# Altium PCB Layout_Dendro.PcbDoc (part 1 of 2)
Units mm, origin at the board's own origin, x right, y up, seen from the top; angles counter-clockwise.
Board outline 80 x 80 mm, 4 copper layers (L1 - TOP (Sig), L2 (GND), L3 (GND), L4 - BOT (Sig)), stack 0.603 mm thick; 132 components, 78 nets, 366 pads, 100 vias.
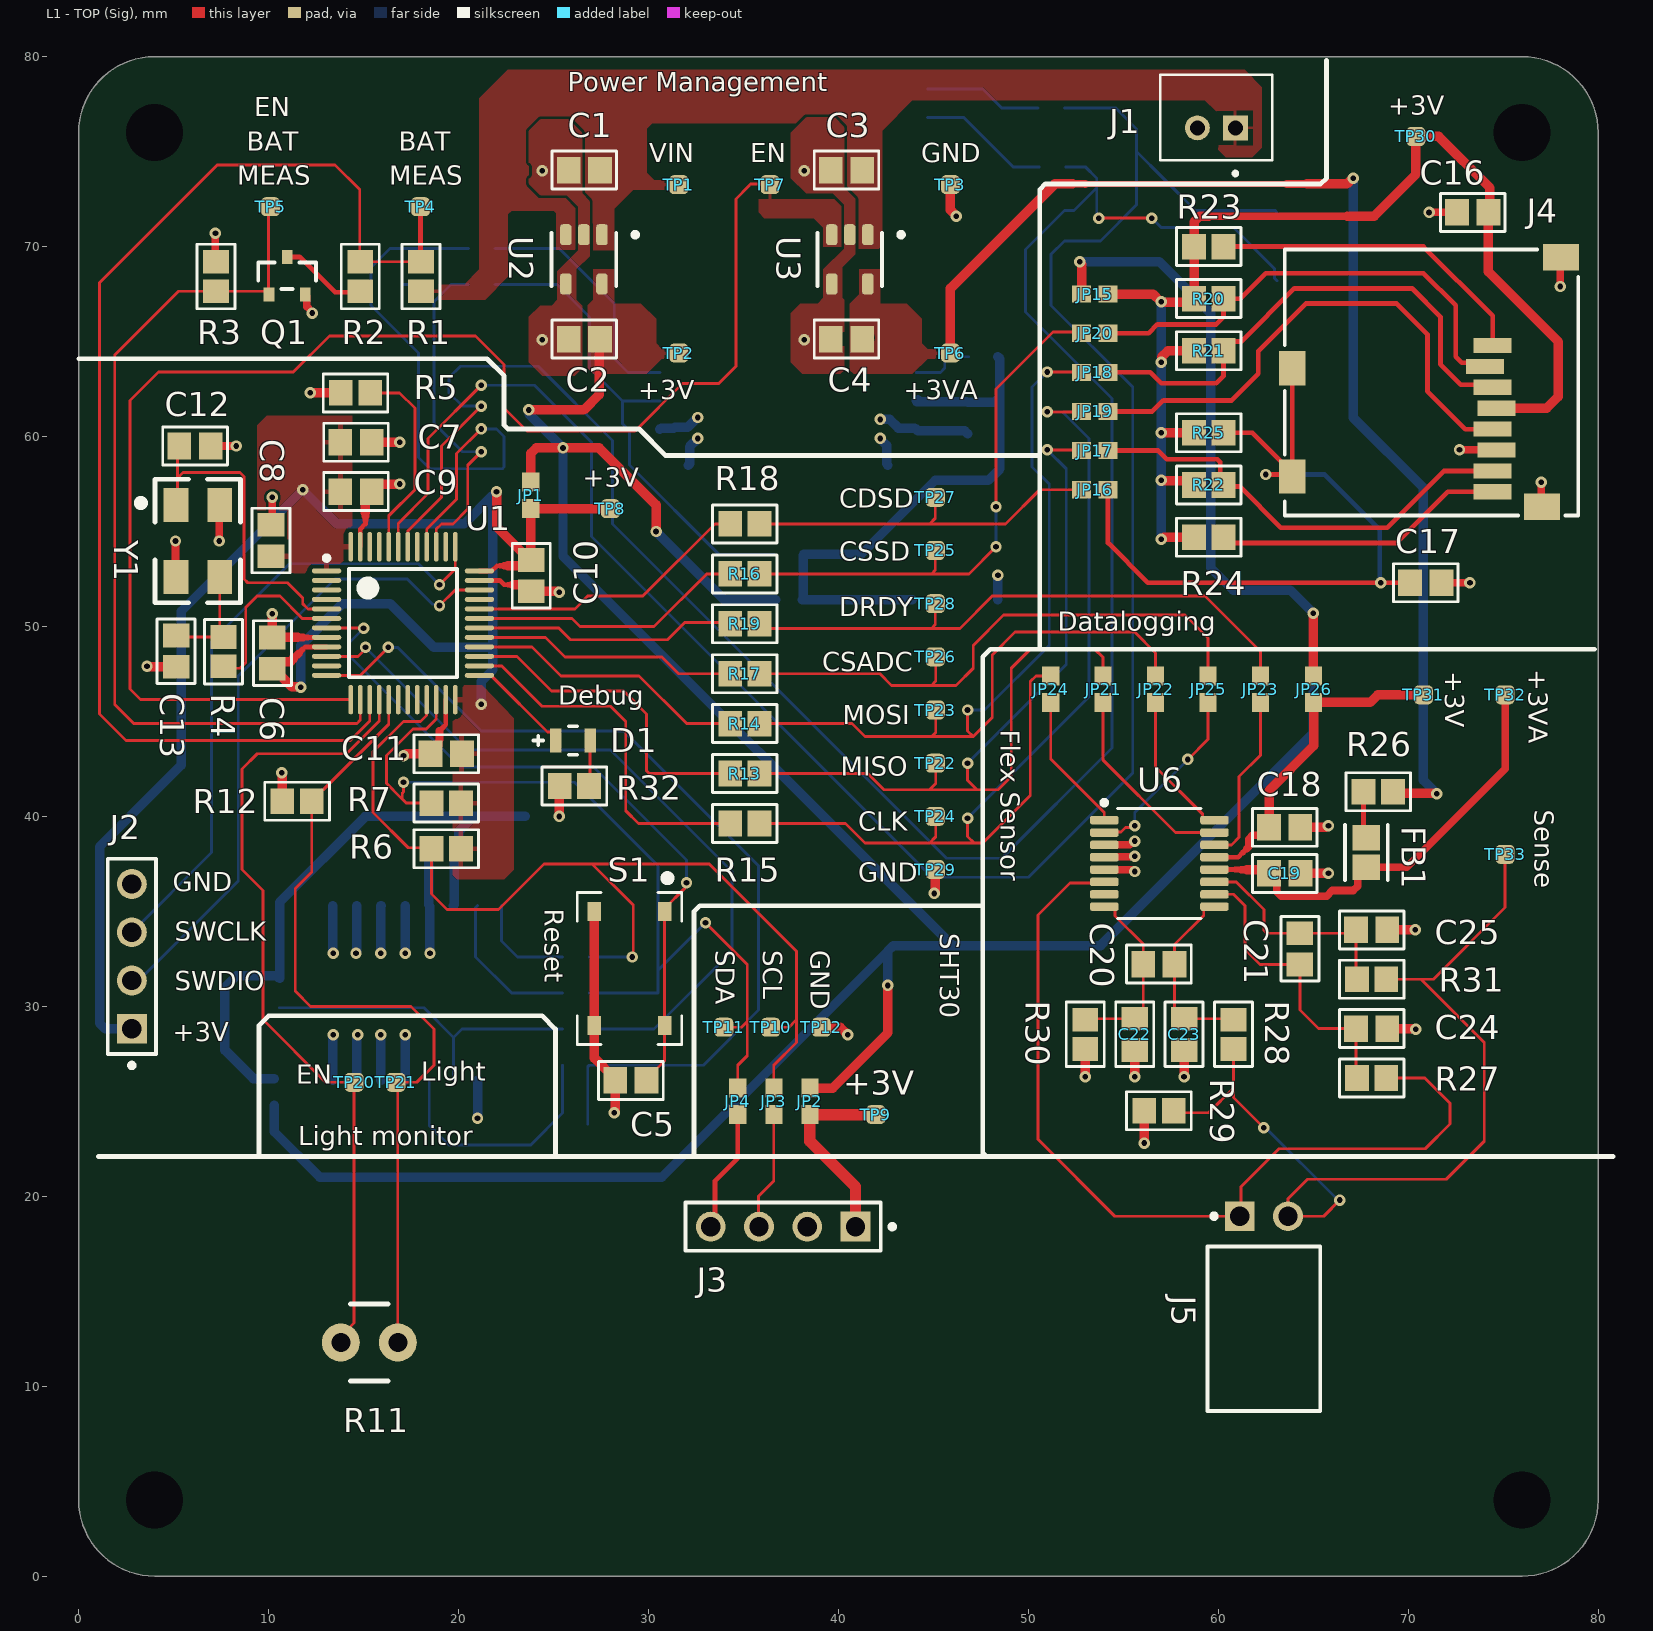
[diagram p0: L1 - TOP (Sig) view]
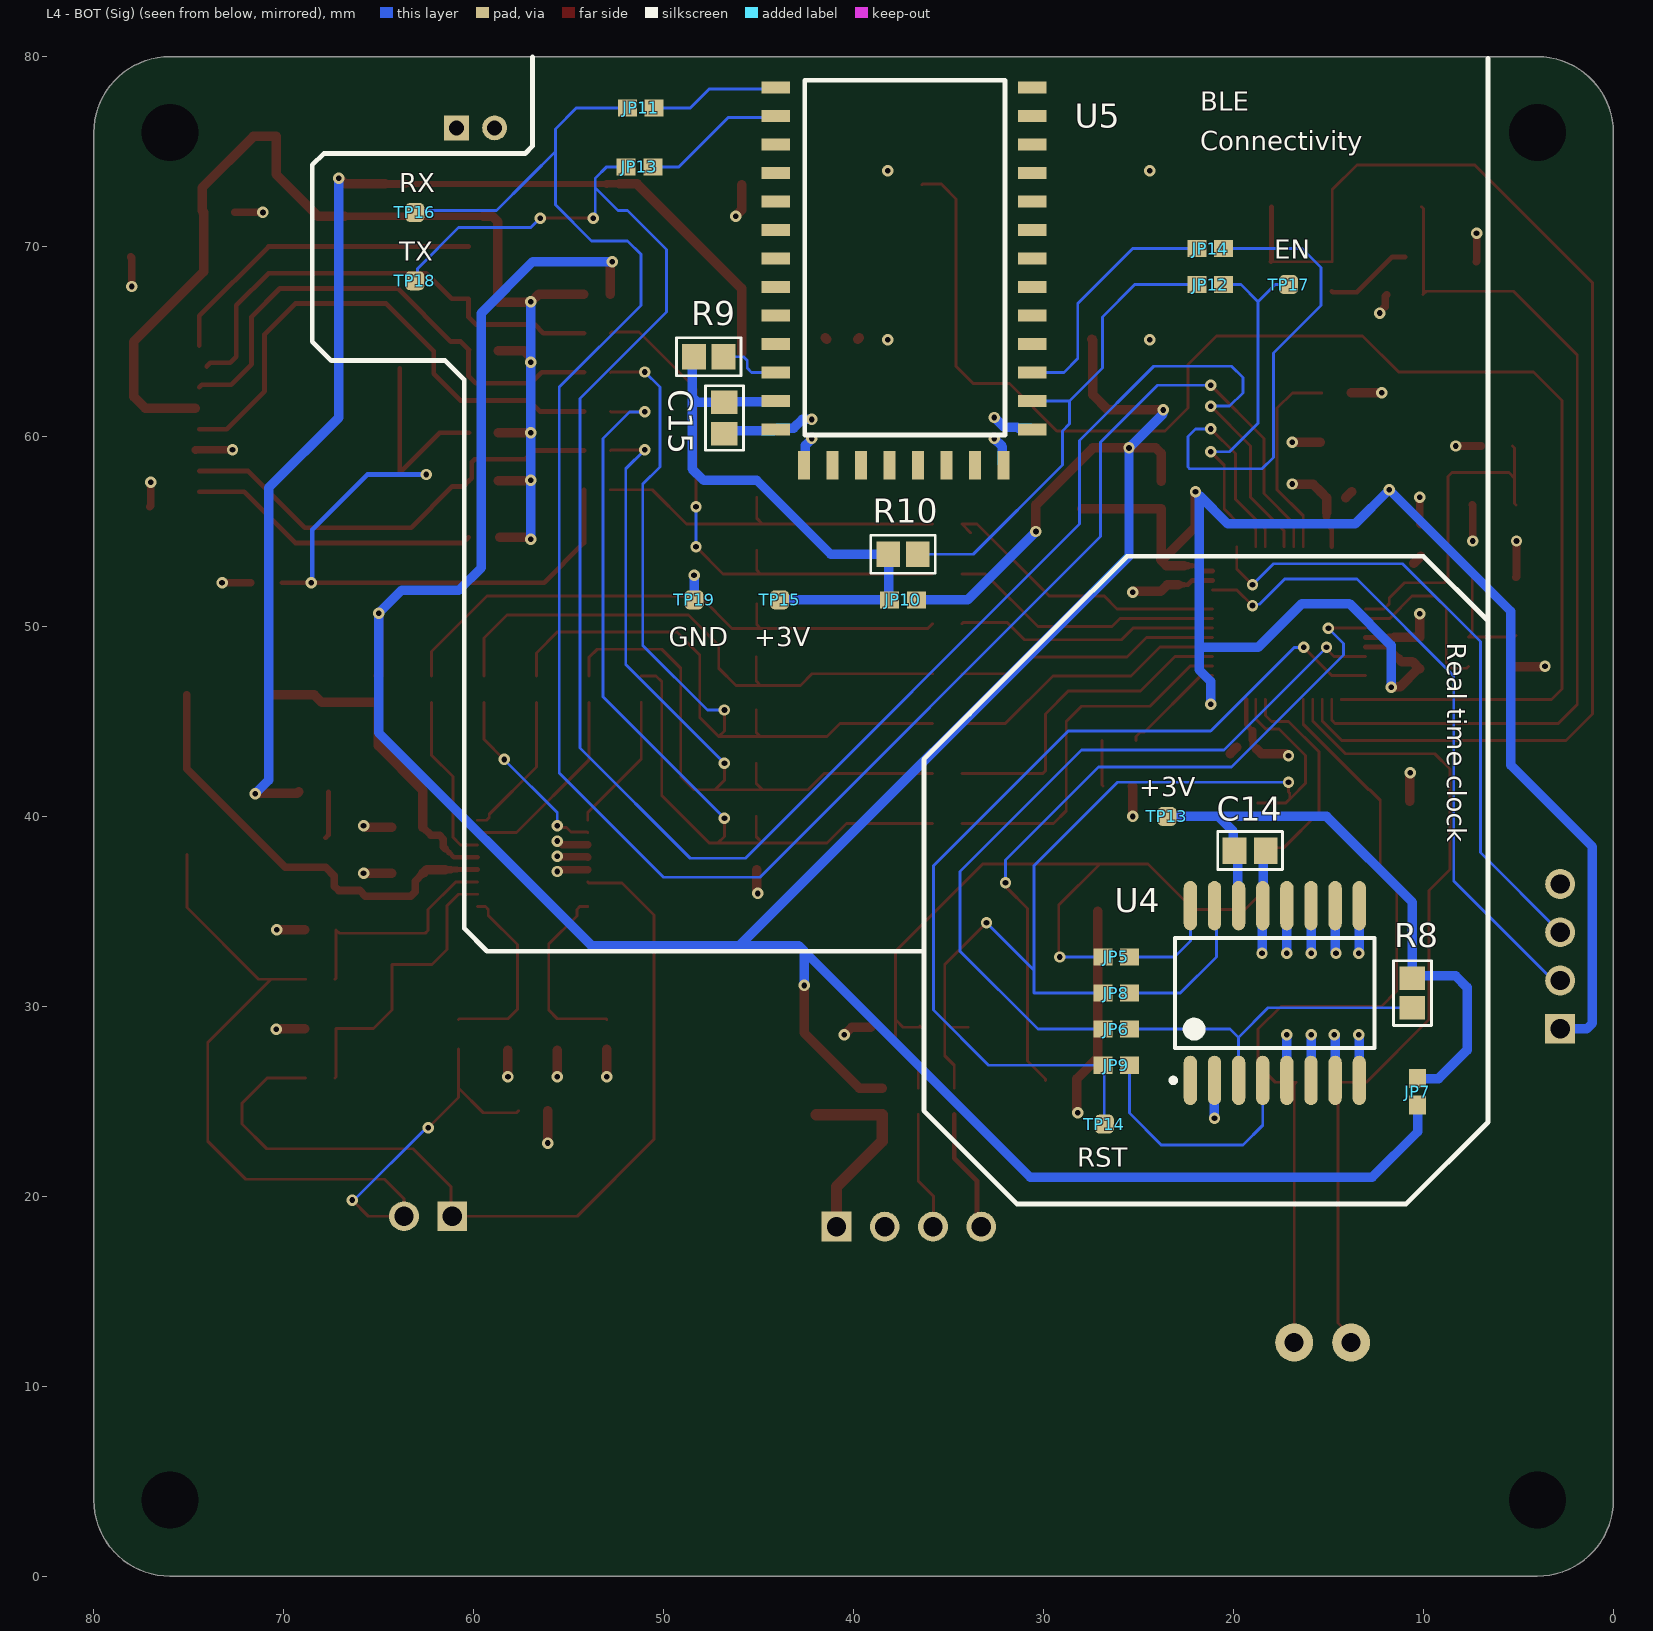
[diagram p1: L4 - BOT (Sig) view, seen from below]
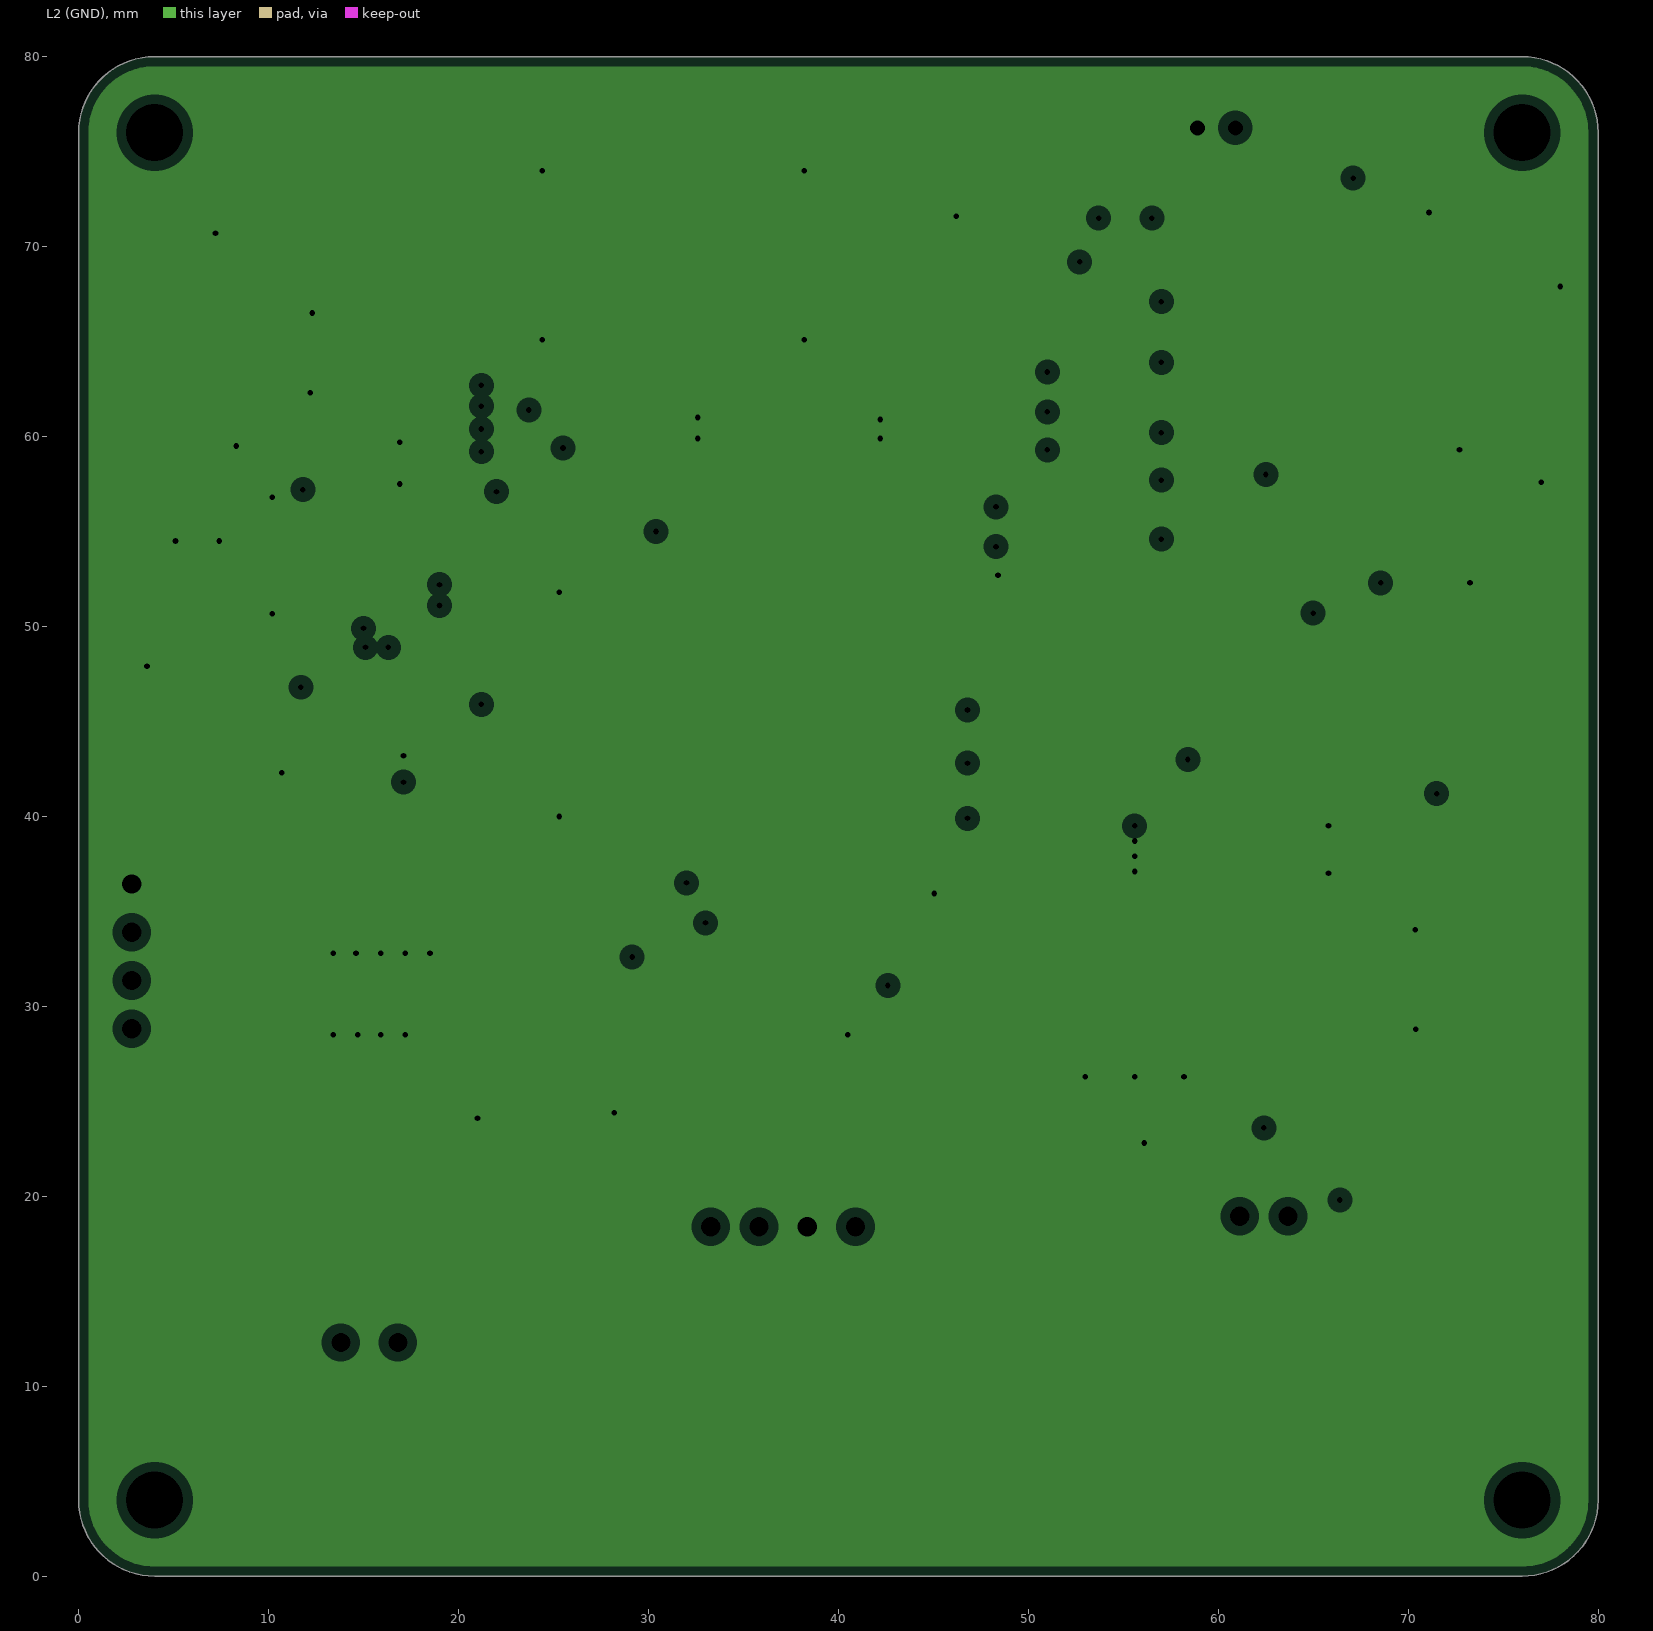
[diagram p2: L2 (GND), clearances drawn from the general rule]
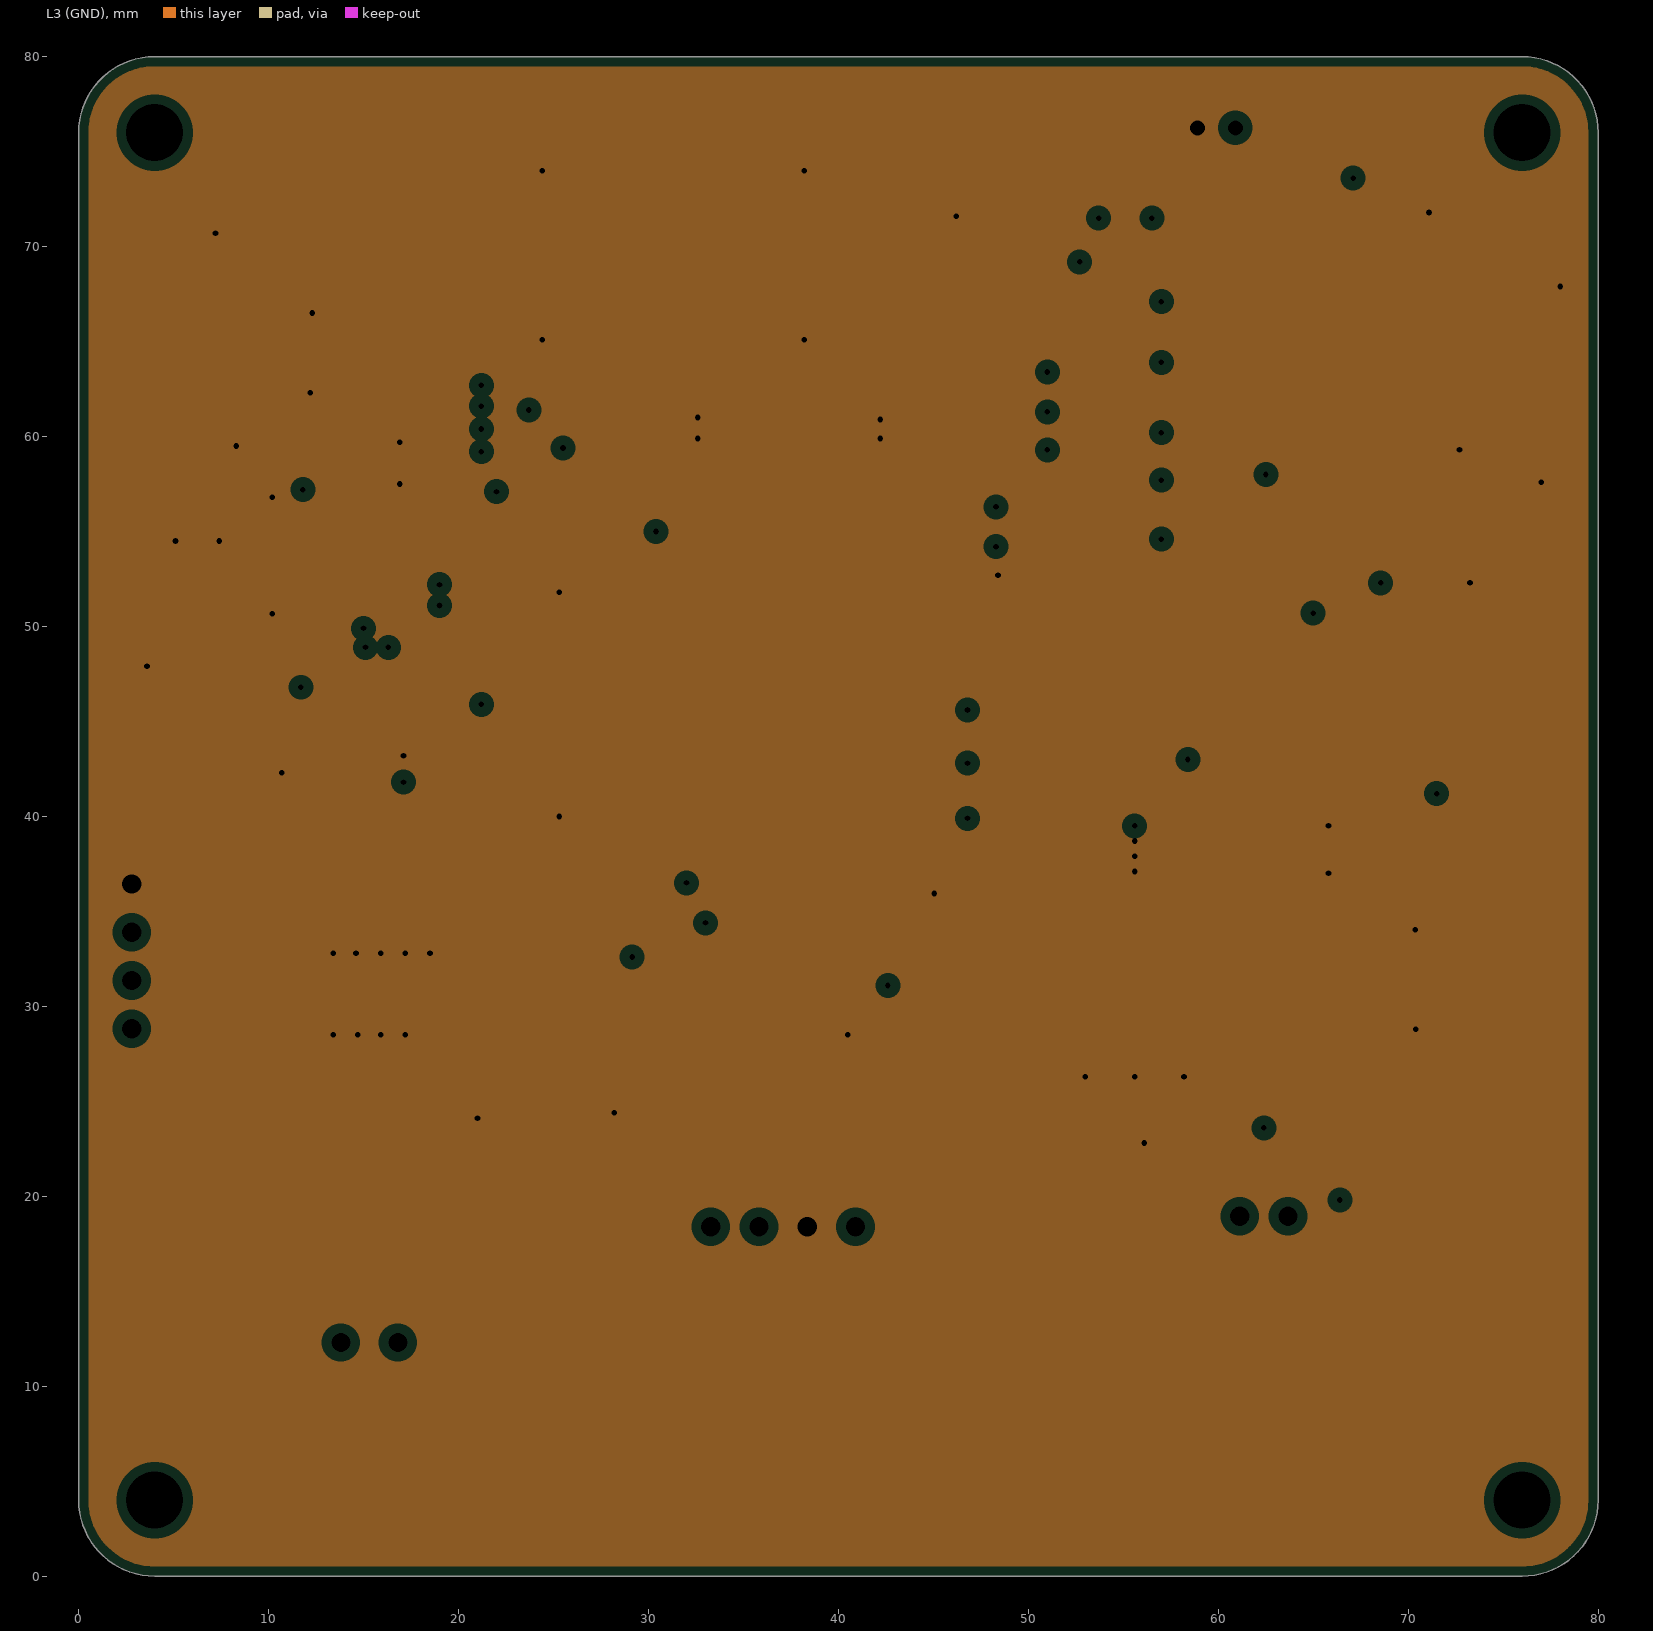
[diagram p3: L3 (GND), clearances drawn from the general rule]
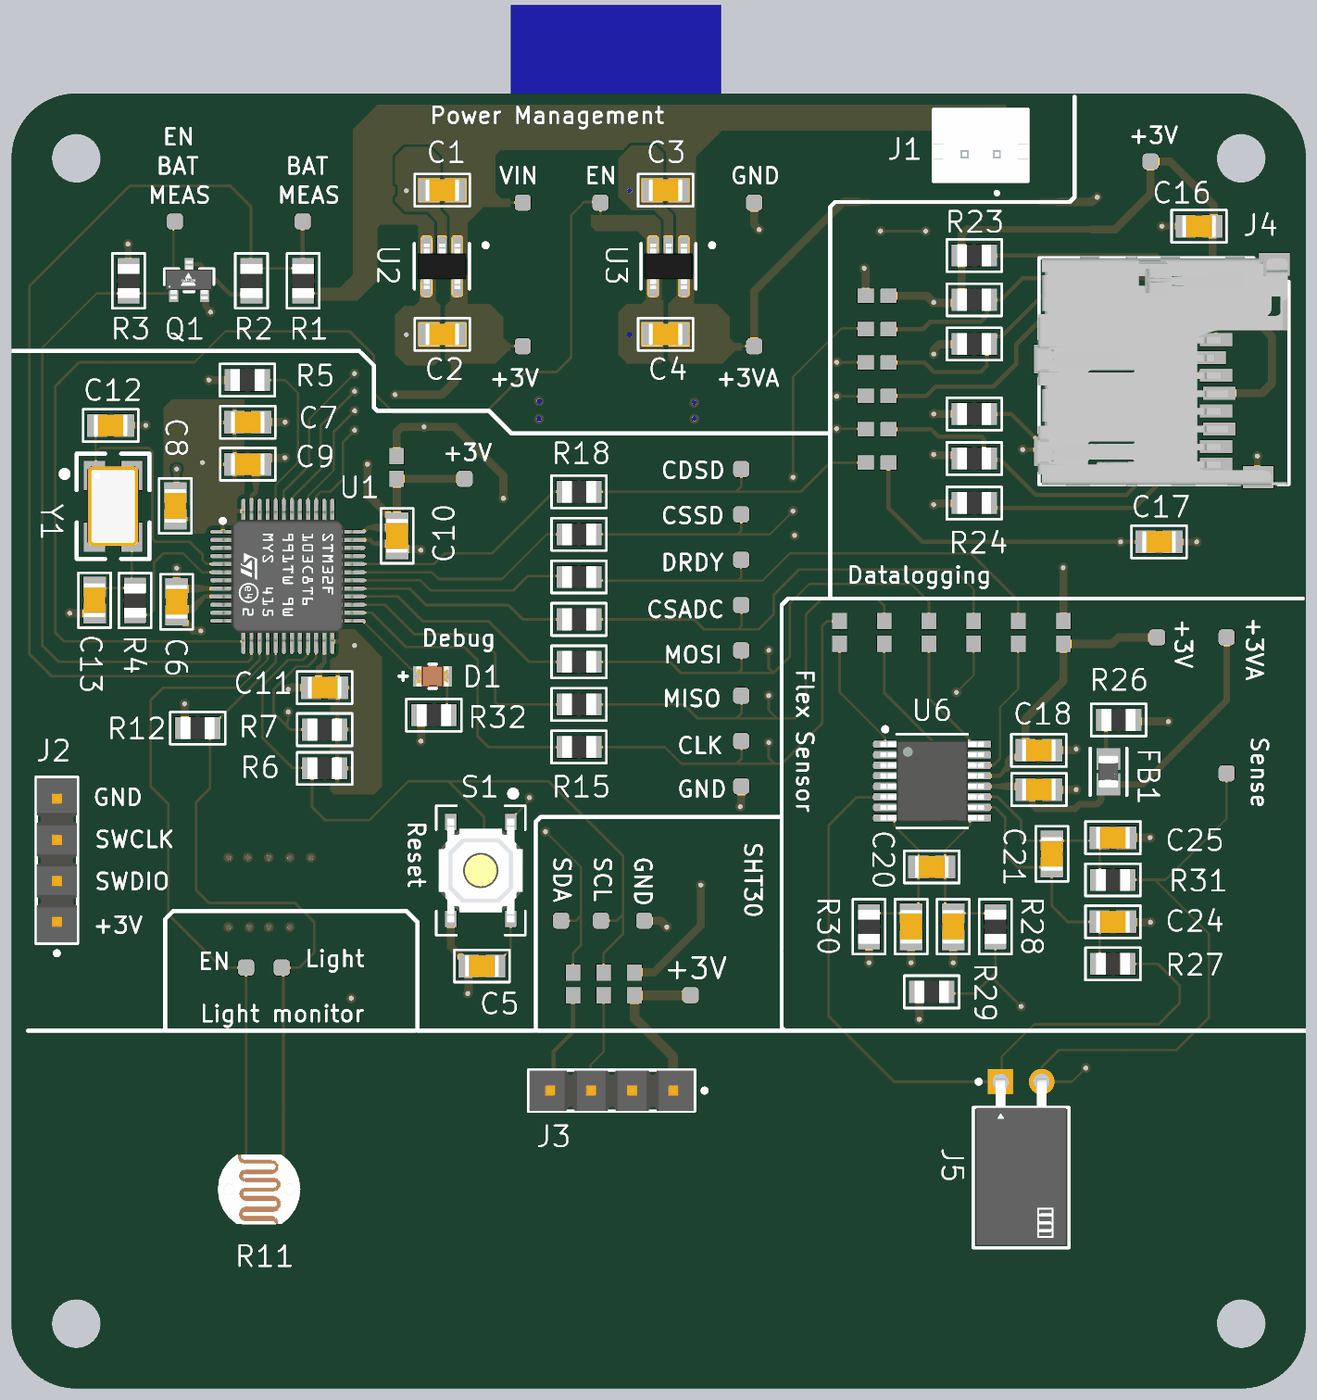
[diagram p5: 3D render of the assembled board from above, using the file's embedded part models]

## Layer stack, top to bottom
Top Solder: solder mask 0.0102, Solder Resist, Dk 3.5
L1 - TOP (Sig): signal copper 0.0356
Dielectric 2: prepreg 0.0711, PP-006, Dk 4.1
L2 (GND): plane copper 0.035, net GND
Dielectric 1: dielectric 0.32, FR-4, Dk 4.8
L3 (GND): plane copper 0.035, net GND
Dielectric 3: prepreg 0.0711, PP-006, Dk 4.1
L4 - BOT (Sig): signal copper 0.0356
Bottom Solder: solder mask 0.0102, Solder Resist, Dk 3.5

## Board outline
0,4 0,76 cw(c4,76) 4,80 76,80 cw(c76,76) 80,76 80,4 cw(c76,4) 76,0 4,0 cw(c4,4)

## Design rules (kind name [scope] priority, off if disabled: settings)
Clearance TightPitch [InComponent('U1') OR InComponent('U6') OR InComponent('J5')] p1: gap=0.15 ignorepadtopadclearanceinfootprint=FALSE
Clearance SerialBuses [InNetClass('I2C') OR InNetClass('SPI') OR InNetClass('UART') OR InNetClass('SWD')] p2: gap=0.15 ignorepadtopadclearanceinfootprint=FALSE
Clearance [All] p3: gap=0.15 ignorepadtopadclearanceinfootprint=FALSE
HoleSize [All] p1: absolutevalues=TRUE maxlimit=6 minlimit=0.15 maxpercent=80.000 minpercent=20.000
MinimumSolderMaskSliver [All] p1: minsoldermaskwidth=0.1
PlaneClearance [All] p1: clearance=0.508
PlaneConnect [All] p1: planeconnectstyle=Direct reliefexpansion=0.508 reliefentries=4 reliefconductorwidth=0.254 reliefairgap=0.254
PolygonConnect "Power Polygon" [InNet('VIN') or InNet('GND') or InNet('+3V')or InNet('+3VA')] p1: thpad.connectstyle=Relief thpad.reliefconductorwidth=0.254 thpad.reliefentries=4 thpad.polygonreliefangle="90 Angle" thpad.airgapwidth=0.254 smdpad.connectstyle=Direct smdpad.reliefconductorwidth=0.254 smdpad.reliefentries=4 smdpad.polygonreliefangle="90 Angle" smdpad.airgapwidth=0.254 via.connectstyle=Direct via.reliefconductorwidth=0.254 via.reliefentries=4 via.polygonreliefangle="90 Angle" via.airgapwidth=0.254
PolygonConnect "MCU VDD Polygon" [InNet('+3V_MCU')] p2: thpad.connectstyle=Relief thpad.reliefconductorwidth=0.254 thpad.reliefentries=4 thpad.polygonreliefangle="90 Angle" thpad.airgapwidth=0.254 smdpad.connectstyle=Relief smdpad.reliefconductorwidth=0.254 smdpad.reliefentries=4 smdpad.polygonreliefangle="90 Angle" smdpad.airgapwidth=0.254 via.connectstyle=Direct via.reliefconductorwidth=0.254 via.reliefentries=4 via.polygonreliefangle="90 Angle" via.airgapwidth=0.254
PolygonConnect [All] p3: connectstyle=Relief reliefconductorwidth=0.15 reliefentries=4 polygonreliefangle="90 Angle" airgapwidth=0.254
RoutingVias [All] p1: holewidth=0.3 width=0.6 viastyle="Through Hole" minholewidth=0.3 minwidth=0.6 maxholewidth=0.5 maxwidth=1
SilkToSolderMaskClearance [IsPad] p1: minsilkscreentomaskgap=0.15 clearancetoexposedcopper=TRUE
SolderMaskExpansion TightSolderMask [InComponent('U6')] p1: expansion=0.05 istentingtop=FALSE
SolderMaskExpansion [All] p2: expansion=0.05 istentingtop=FALSE
SupplyNets "Schematic Supply Nets_11" [InNet('+3V_ADS_A')] p1: voltage=0.000
SupplyNets "Schematic Supply Nets_10" [InNet('+3V_BLE')] p2: voltage=0.000
SupplyNets "Schematic Supply Nets_9" [InNet('+3V_RTC')] p3: voltage=0.000
SupplyNets "Schematic Supply Nets_8" [InNet('+3V_SD')] p4: voltage=0.000
SupplyNets "Schematic Supply Nets_7" [InNet('+3V')] p5: voltage=0.000
SupplyNets "Schematic Supply Nets_6" [InNet('+3VA')] p6: voltage=0.000
SupplyNets "Schematic Supply Nets_5" [InNet('GND')] p7: voltage=0.000
SupplyNets "Schematic Supply Nets_3" [InNet('VIN')] p8: voltage=0.000
SupplyNets "Schematic Supply Nets_2" [InNet('+3V_ADS_D')] p9: voltage=0.000
SupplyNets "Schematic Supply Nets_1" [InNet('+3V_SHT')] p10: voltage=0.000
SupplyNets "Schematic Supply Nets" [InNet('+3V_MCU')] p11: voltage=0.000
Width Power [InNet('+3V') OR InNet('+3VA') OR InNet('+3V_ADS_A')OR InNet('+3V_ADS_D') OR InNet('+3V_BLE') OR InNet('+3V_MCU') OR InNet('+3V_RTC') OR InNet('+3V_SD') OR InNet('+3V_SHT') OR InNet('VBAT') OR InNet('VIN') OR InNet('GND')] p1: maxlimit=1 minlimit=0.25 preferedwidth=0.5 minimp=50.000000 maximp=50.000000 favimp=50.000000
Width DigitalSignals [All] p2: maxlimit=0.25 minlimit=0.15 preferedwidth=0.15 minimp=50.000000 maximp=50.000000 favimp=50.000000
Width [All] p3: maxlimit=0.254 minlimit=0.254 preferedwidth=0.254
25 further rules are at their usual default settings.

## Classes and differential pairs
net class UART: HM10_RX HM10_TX RX_MCU TX_MCU
net class SWD: SWCLK SWDIO
net class SPI: ADS_CS ADS_DIN ADS_DOUT ADS_SCLK SD_CLK SD_CMD SD_DAT0 SD_DAT3 SPI_CLK SPI_CLK_MCU SPI_CS_ADC SPI_CS_ADC_MCU SPI_CS_SD SPI_CS_SD_MCU SPI_MISO SPI_MISO_MCU SPI_MOSI SPI_MOSI_MCU
net class I2C: DS_SCL DS_SDA I2C_SCL I2C_SDA SHT_SCL SHT_SDA
component class SPI_Devices: R13 R14 R15 R16 R17 R18 R19 TP22 TP23 TP24 TP25 TP26 TP27 TP28 TP29
component class Power_Management: C1 C2 C3 C4 J1 Q1 R1 R2 R3 TP1 TP2 TP3 TP4 TP5 TP6 TP7 U2 U3
component class MCU_Core: C5 C6 C7 C8 C9 C10 C11 C12 C13 J2 JP1 R4 R5 S1 TP8 Y1
component class Main: U1
component class Light_Monitoring: R11 R12 TP20 TP21
component class I2C_Devices: C14 J3 JP2 JP3 JP4 JP5 JP6 JP7 JP8 JP9 R6 R7 R8 TP9 TP10 TP11 TP12 TP13 TP14 U4
component class Flex_Sensor: +3VA C18 JP21 JP22 JP23 JP24 JP25 JP26 TP31 U6
component class Debugging_Leds: D1 R32
component class Datalogging: C16 C17 J4 JP15 JP16 JP17 JP18 JP19 JP20 R20 R21 R22 R23 R24 R25 TP30
component class BLE_Connectivity: C15 JP10 JP11 JP12 JP13 JP14 R9 R10 TP15 TP16 TP17 TP18 TP19 U5
component class ADS_AFE: C19 C20 C21 C22 C23 C24 C25 FB1 J5 R26 R27 R28 R29 R30 R31 TP32 TP33

## Components (designator, comment, footprint, x,y, rotation, side; value= is the part's Value field where it differs from the comment)
C1 "Simbolo de capacitor genérico" CAP_0805 26.625,74.027 r180 top
C2 "Simbolo de capacitor genérico" CAP_0805 26.625,65.127 r180 top
C3 "Simbolo de capacitor genérico" CAP_0805 40.425,74.027 r180 top
C4 "Simbolo de capacitor genérico" CAP_0805 40.425,65.127 r180 top
C5 "Simbolo de capacitor genérico" CAP_0805 29.075,26.1 r180 top
C6 "Simbolo de capacitor genérico" CAP_0805 10.2,48.6 r90 top
C7 "Simbolo de capacitor genérico" CAP_0805 14.6,59.7 r0 top
C8 "Simbolo de capacitor genérico" CAP_0805 10.127,54.525 r90 top
C9 "Simbolo de capacitor genérico" CAP_0805 14.6,57.1 r0 top
C10 "Simbolo de capacitor genérico" CAP_0805 23.827,52.675 r270 top
C11 "Simbolo de capacitor genérico" CAP_0805 19.352,43.3 r180 top
C12 "Simbolo de capacitor genérico" CAP_0805 6.127,59.5 r0 top
C13 "Simbolo de capacitor genérico" CAP_0805 5.127,48.7 r270 top
C14 "Simbolo de capacitor genérico" CAP_0805 19.125,38.2 r180 bottom
C15 "Simbolo de capacitor genérico" CAP_0805 46.8,60.975 r270 bottom
C16 "Simbolo de capacitor genérico" CAP_0805 73.4,71.8 r180 top
C17 "Simbolo de capacitor genérico" CAP_0805 70.925,52.3 r0 top
C18 "Simbolo de capacitor genérico" CAP_0805 63.498,39.425 r0 top
C19 "Simbolo de capacitor genérico" CAP_0805 63.5,37.001 r0 top
C20 "Simbolo de capacitor genérico" CAP_0805 56.875,32.225 r180 top
C21 "Simbolo de capacitor genérico" CAP_0805 64.3,33.025 r90 top
C22 "Simbolo de capacitor genérico" CAP_0805 55.6,28.525 r270 top
C23 "Simbolo de capacitor genérico" CAP_0805 58.2,28.525 r270 top
C24 "Simbolo de capacitor genérico" CAP_0805 68.075,28.825 r0 top
C25 "Simbolo de capacitor genérico" CAP_0805 68.075,34.025 r0 top
D1 "Red LED" FP-SML-LX0805SRC-TR-MFG 26.027,44 r0 top
FB1 "MPZ2012S102AT000" FP-MPZ2012-IPC_B 67.798,38.101 r270 top
J1 "JST CONN" JST_B2B-PH-K-S 59.9,76.8 r0 top
J2 "HTSW-104-07-G-S" FP-HTSW-104-07-G-S-MFG 2.8,32.63 r90 top
J3 "HTSW-104-07-G-S" FP-HTSW-104-07-G-S-MFG 37.09,18.4 r180 top
J4 "MEM2061-01-188-00-A_revA" MEM2061-01-188-00-A_revA 71.225,62.85 r90 top
J5 "PPTC021LGBN-RC" FP-PPTC021LGBN-RC-MFG 62.4,13.1 r0 top
JP1 "Generic JP" RES_0R_0603 23.8,56.9 r270 top value=0Ω
JP2 "Generic JP" RES_0R_0603 38.5,25 r270 top value=0Ω
JP3 "Generic JP" RES_0R_0603 36.6,25 r270 top value=0Ω
JP4 "Generic JP" RES_0R_0603 34.7,25 r270 top value=0Ω
JP5 "Generic JP" RES_0R_0603 26.178,32.6 r180 bottom value=0Ω
JP6 "Generic JP" RES_0R_0603 26.178,28.8 r0 bottom value=0Ω
JP7 "Generic JP" RES_0R_0603 10.3,25.5 r90 bottom value=0Ω
JP8 "Generic JP" RES_0R_0603 26.178,30.7 r180 bottom value=0Ω
JP9 "Generic JP" RES_0R_0603 26.178,26.9 r0 bottom value=0Ω
JP10 "Generic JP" RES_0R_0603 37.4,51.4 r0 bottom value=0Ω
JP11 "Generic JP" RES_0R_0603 51.2,77.3 r180 bottom value=0Ω
JP12 "Generic JP" RES_0R_0603 21.225,68 r180 bottom value=0Ω
JP13 "Generic JP" RES_0R_0603 51.273,74.2 r180 bottom value=0Ω
JP14 "Generic JP" RES_0R_0603 21.225,69.9 r180 bottom value=0Ω
JP15 "Generic JP" RES_0R_0603 53.5,67.5 r0 top value=0Ω
JP16 "Generic JP" RES_0R_0603 53.5,57.2 r180 top value=0Ω
JP17 "Generic JP" RES_0R_0603 53.5,59.26 r0 top value=0Ω
JP18 "Generic JP" RES_0R_0603 53.5,63.38 r0 top value=0Ω
JP19 "Generic JP" RES_0R_0603 53.5,61.32 r0 top value=0Ω
JP20 "Generic JP" RES_0R_0603 53.5,65.44 r0 top value=0Ω
JP21 "Generic JP" RES_0R_0603 53.94,46.7 r270 top value=0Ω
JP22 "Generic JP" RES_0R_0603 56.7,46.7 r270 top value=0Ω
JP23 "Generic JP" RES_0R_0603 62.22,46.7 r90 top value=0Ω
JP24 "Generic JP" RES_0R_0603 51.18,46.7 r270 top value=0Ω
JP25 "Generic JP" RES_0R_0603 59.46,46.7 r270 top value=0Ω
JP26 "Generic JP" RES_0R_0603 65.02,46.7 r270 top value=0Ω
Q1 "SI2302CDS-T1-E3" FP-S-03946-MFG 10.974,68.466 r90 top
R1 "Simbolo de resistencia genérica" RES_0805 18.027,68.425 r90 top value=10kΩ
R2 "Simbolo de resistencia genérica" RES_0805 14.827,68.425 r270 top value=22kΩ
R3 "Simbolo de resistencia genérica" RES_0805 7.227,68.425 r90 top value=47kΩ
R4 "Simbolo de resistencia genérica" RES_0805 7.627,48.675 r270 top value=2kΩ
R5 "Simbolo de resistencia genérica" RES_0805 14.575,62.3 r180 top value=10kΩ
R6 "Simbolo de resistencia genérica" RES_0805 19.352,38.3 r180 top value=4k7Ω
R7 "Simbolo de resistencia genérica" RES_0805 19.352,40.7 r180 top value=4k7Ω
R8 "Simbolo de resistencia genérica" RES_0805 10.578,30.7 r270 bottom value=4k7Ω
R9 "Simbolo de resistencia genérica" RES_0805 47.625,64.2 r180 bottom value=47kΩ
R10 "Simbolo de resistencia genérica" RES_0805 37.4,53.8 r180 bottom value=47kΩ
R11 "Simbolo de LDR genérico" "Generic LDR" 15.3,12.3 r0 top
R12 "Simbolo de resistencia genérica" RES_0805 11.5,40.8 r180 top value=100kΩ
R13 "Simbolo de resistencia genérica" RES_0805 35.075,42.256 r0 top value=47Ω
R14 "Simbolo de resistencia genérica" RES_0805 35.075,44.885 r0 top value=47Ω
R15 "Simbolo de resistencia genérica" RES_0805 35.075,39.627 r0 top value=47Ω
R16 "Simbolo de resistencia genérica" RES_0805 35.075,52.771 r0 top value=47Ω
R17 "Simbolo de resistencia genérica" RES_0805 35.075,47.514 r0 top value=47Ω
R18 "Simbolo de resistencia genérica" RES_0805 35.075,55.4 r0 top value=47Ω
R19 "Simbolo de resistencia genérica" RES_0805 35.075,50.142 r0 top value=47Ω
R20 "Simbolo de resistencia genérica" RES_0805 59.5,67.26 r0 top value=47kΩ
R21 "Simbolo de resistencia genérica" RES_0805 59.5,64.52 r0 top value=47kΩ
R22 "Simbolo de resistencia genérica" RES_0805 59.5,57.45 r0 top value=47kΩ
R23 "Simbolo de resistencia genérica" RES_0805 59.5,70 r0 top value=47kΩ
R24 "Simbolo de resistencia genérica" RES_0805 59.5,54.7 r0 top value=47kΩ
R25 "Simbolo de resistencia genérica" RES_0805 59.5,60.2 r0 top value=47kΩ
R26 "Simbolo de resistencia genérica" RES_0805 68.425,41.3 r180 top value=220mΩ
R27 "Simbolo de resistencia genérica" RES_0805 68.075,26.225 r180 top value=15kΩ
R28 "Simbolo de resistencia genérica" RES_0805 60.8,28.525 r270 top value=8k2Ω
R29 "Simbolo de resistencia genérica" RES_0805 56.875,24.5 r180 top value=15kΩ
R30 "Simbolo de resistencia genérica" RES_0805 53,28.525 r270 top value=8k2Ω
R31 "Simbolo de resistencia genérica" RES_0805 68.075,31.425 r180 top value=15kΩ
R32 "Simbolo de resistencia genérica" RES_0805 26.1,41.6 r180 top value=82Ω
S1 "Tactile push button 5,2mm x 5,2mm" "Switch Tactile 5,2mm x 5,2mm" 29,32 r270 top
TP1 "Testpoint SMD" Testpoint_SMD 31.6,73.26 r270 top
TP2 "Testpoint SMD" Testpoint_SMD 31.6,64.394 r0 top
TP3 "Testpoint SMD" Testpoint_SMD 45.9,73.26 r270 top
TP4 "Testpoint SMD" Testpoint_SMD 18,72.1 r0 top
TP5 "Testpoint SMD" Testpoint_SMD 10.1,72.1 r0 top
TP6 "Testpoint SMD" Testpoint_SMD 45.9,64.394 r270 top
TP7 "Testpoint SMD" Testpoint_SMD 36.4,73.26 r90 top
TP8 "Testpoint SMD" Testpoint_SMD 28,56.2 r90 top
TP9 "Testpoint SMD" Testpoint_SMD 41.973,24.3 r0 top
TP10 "Testpoint SMD" Testpoint_SMD 36.433,28.9 r90 top
TP11 "Testpoint SMD" Testpoint_SMD 33.967,28.9 r90 top
TP12 "Testpoint SMD" Testpoint_SMD 39.1,28.9 r90 top
TP13 "Testpoint SMD" Testpoint_SMD 23.5,40 r90 bottom
TP14 "Testpoint SMD" Testpoint_SMD 26.8,23.8 r90 bottom
TP15 "Testpoint SMD" Testpoint_SMD 43.9,51.4 r90 bottom
TP16 "Testpoint SMD" Testpoint_SMD 63.1,71.8 r90 bottom
TP17 "Testpoint SMD" Testpoint_SMD 17.1,68 r90 bottom
TP18 "Testpoint SMD" Testpoint_SMD 63.1,68.2 r90 bottom
TP19 "Testpoint SMD" Testpoint_SMD 48.4,51.4 r90 bottom
TP20 "Testpoint SMD" Testpoint_SMD 14.5,26 r90 top
TP21 "Testpoint SMD" Testpoint_SMD 16.7,26 r90 top
TP22 "Testpoint SMD" Testpoint_SMD 45.1,42.8 r180 top
TP23 "Testpoint SMD" Testpoint_SMD 45.1,45.6 r180 top
TP24 "Testpoint SMD" Testpoint_SMD 45.1,40 r180 top
TP25 "Testpoint SMD" Testpoint_SMD 45.1,54 r90 top
TP26 "Testpoint SMD" Testpoint_SMD 45.1,48.4 r180 top
TP27 "Testpoint SMD" Testpoint_SMD 45.1,56.8 r270 top
TP28 "Testpoint SMD" Testpoint_SMD 45.1,51.2 r180 top
TP29 "Testpoint SMD" Testpoint_SMD 45.1,37.2 r180 top
TP30 "Testpoint SMD" Testpoint_SMD 70.4,75.8 r90 top
TP31 "Testpoint SMD" Testpoint_SMD 70.8,46.4 r180 top
TP32 "Testpoint SMD" Testpoint_SMD 75.1,46.4 r90 top
TP33 "Testpoint SMD" Testpoint_SMD 75.1,38 r90 top
U1 "STM32F103C8T6" STM-LQFP48_L 17.077,50.175 r0 top
U2 "TPS7A2030PDBVR" SOT-23 26.6,69.327 r270 top
U3 "TPS7A2030PDBVR" SOT-23 40.6,69.327 r270 top
U4 "DS3231S#" SOIC_16_M 17.823,30.7 r90 bottom
U5 "HM10 BLE Module" HM10_FOOTPRINT 36.6,78.375 r180 bottom
U6 "ADS1220" TSSOP-16 56.9,37.525 r0 top
Y1 "Crystal SMD 4-P" SMD5032-4P 6.277,54.5 r270 top

## Footprints (in the part's own frame and the unit in brackets; to place one, negate y for a bottom-side part, rotate by r counter-clockwise, add the part's x,y. Pads: shape width x height; smd on the part's side, far side on the other; paste and mask are expansions set on the pad)
CAP_0805 [mm] "Chip Capacitor, 2-Leads, Body 2,00x1,25mm, IPC Medium Density"
  rect 1.25x1.4 smd: 1(-0.825,0) 2(0.825,0)
  silkscreen extent -1.7,-1 1.7,1, body extent -1.05,-0.67 1.05,0.67, height 1.35
FP-HTSW-104-07-G-S-MFG [mm]
  rect 1.57x1.57 hole 1.02 paste-2539.97 mask+0: 1(-3.81,0)
  round 1.57 hole 1.02 paste-2539.97 mask+0: 2(-1.27,0) 3(1.27,0) 4(3.81,0)
  silkscreen extent -5.87,-1.27 5.14,1.27, body extent -5.24,-1.37 5.24,1.37, height 0.25
FP-MPZ2012-IPC_B [mm]
  rect 1.354x1.456 smd paste+0 mask+0: 1(-0.776,0) 2(0.776,0)
  silkscreen extent -1.45,-1.13 1.45,1.13, body extent -1.7,-0.98 1.7,0.98, height 0.25
FP-PPTC021LGBN-RC-MFG [mm]
  rect 1.57x1.57 hole 1.02 paste-2539.97 mask+0: 1(-1.27,5.85)
  round 1.57 hole 1.02 paste-2539.97 mask+0: 2(1.27,5.85)
  silkscreen extent -2.97,-4.4 2.97,5.97, body extent -3.07,-4.5 3.07,6.74, height 0.25
FP-S-03946-MFG [mil]
  rect 29x22 smd paste+0 mask+0: 1(-39,37.5) 2(-39,-37.5) 3(39,0)
  silkscreen extent -28,-60 28,60, body extent -57,-64 57,64, height 10
FP-SML-LX0805SRC-TR-MFG [mm]
  rect 0.6x1.25 smd paste+0 mask+0: 1(-0.9,0) 2(0.9,0)
  silkscreen extent -2.07,-0.75 0.22,0.75, body extent -1.3,-0.85 1.3,0.85, height 0.25
"Generic LDR" [mm] "Footprint de un LDR genérico THT."
  round 2 hole 1: 1(-1.5,0) 2(1.5,0)
  silkscreen extent -1,-2.03 1,2.03, body extent -2.55,-2.15 2.55,2.15, height 3.1
HM10_FOOTPRINT [mm] "26.9X13X2.2_BOARD"
  rect 1.5x0.635 smd: 1(-7.5,0) 2(-7.5,-1.5) 3(-7.5,-3) 4(-7.5,-4.5) 5(-7.5,-6) 6(-7.5,-7.5) 7(-7.5,-9) 8(-7.5,-10.5) 9(-7.5,-12) 10(-7.5,-13.5) 11(-7.5,-15) 12(-7.5,-16.5) 13(-7.5,-18) 22(6,-18) 23(6,-16.5) 24(6,-15) 25(6,-13.5) 26(6,-12) 27(6,-10.5) 28(6,-9) 29(6,-7.5) 30(6,-6) 31(6,-4.5) 32(6,-3) 33(6,-1.5) 34(6,0)
  rect 0.635x1.5 smd: 14(-6,-19.875) 15(-4.5,-19.875) 16(-3,-19.875) 17(-1.5,-19.875) 18(0,-19.875) 19(1.5,-19.875) 20(3,-19.875) 21(4.5,-19.875)
  silkscreen extent -5.97,-18.29 4.57,0.38, body extent -7.26,-19.8 5.74,7.1, height 2.2
JST_B2B-PH-K-S [mm]
  rect 1.308x1.308 / inner round 1.308 / far side rect 1.308x1.308 hole 0.8: 1(1,-0.55)
  round 1.308 hole 0.8: 2(-1,-0.55)
  silkscreen extent -2.95,-3.05 2.95,2.25, body extent -2.95,-2.25 2.95,2.25, height 6
MEM2061-01-188-00-A_revA [mm] "Micro SD Memory Card Connector, 1.88mm Profile SMT,Push Push, with normally closed switch"
  rect 0.8x2 smd: 1(1.94,-3.225) 2(0.84,-2.825) 3(-0.26,-3.225) 4(-1.36,-3.425) 5(-2.46,-3.225) 6(-3.56,-3.425) 7(-4.66,-3.225) 8(-5.76,-3.225)
  rect 1.8x1.4 smd: 9(-4.95,7.325) 10(0.75,7.325)
  rect 1.4x1.9 smd: 11(-6.55,-5.825) 12(6.6,-6.825)
  silkscreen extent -7,-7.72 7,7.73, body extent -7.13,-7.65 7.07,7.8, height 1.95
RES_0R_0603 [mm] "0 Ohm resistor placeholder"
  rect 1x0.9 smd: 1(-0.7,0) 2(0.7,0)
RES_0805 [mm] "Chip Resistor, 2-Leads, Body 2,00x1,25mm, IPC Medium Density"
  rect 1.25x1.35 smd: 1(-0.775,0) 2(0.775,0)
  silkscreen extent -1.7,-1 1.7,1, body extent -1.05,-0.67 1.05,0.67, height 0.6
SMD5032-4P [mm] "5.0 x 3.2mm SMD"
  rect 1.8x1.3 smd: 1(-1.9,-1.15) 2(1.9,-1.15) 3(1.9,1.15) 4(-1.9,1.15)
  silkscreen extent -3.25,-3.12 3.25,2.25, body extent -2.5,-1.6 2.44,1.6, height 0.86
SOIC_16_M [mm] "SOIC, 16-Leads, Body 10.3x7.5mm, Pitch 1.27mm, IPC Low Density"
  oval 2.6x0.7 smd: 1(-4.6,4.445) 2(-4.6,3.175) 3(-4.6,1.905) 4(-4.6,0.635) 5(-4.6,-0.635) 6(-4.6,-1.905) 7(-4.6,-3.175) 8(-4.6,-4.445) 9(4.6,-4.445) 10(4.6,-3.175) 11(4.6,-1.905) 12(4.6,-0.635) 13(4.6,0.635) 14(4.6,1.905) 15(4.6,3.175) 16(4.6,4.445)
  silkscreen extent -4.72,-5.25 2.9,5.47, body extent -5.32,-5.25 5.32,5.25, height 2.65
SOT-23 [mm]
  rrect50% 1.1x0.6 smd mask+0.07: 1(-1.3,0.95) 2(-1.3,0) 3(-1.3,-0.95) 4(1.3,-0.95) 5(1.3,0.95)
  silkscreen extent -1.42,-1.7 1.4,2.83, body extent -1.4,-1.49 1.4,1.5, height 1.18
STM-LQFP48_L [mm] "QFP, 48-Leads, Body 7x7mm, Pitch 0.5mm, IPC High Density"
  oval 1.55x0.25 smd: 1(-4.025,2.75) 2(-4.025,2.25) 3(-4.025,1.75) 4(-4.025,1.25) 5(-4.025,0.75) 6(-4.025,0.25) 7(-4.025,-0.25) 8(-4.025,-0.75) 9(-4.025,-1.25) 10(-4.025,-1.75) 11(-4.025,-2.25) 12(-4.025,-2.75) 25(4.025,-2.75) 26(4.025,-2.25) 27(4.025,-1.75) 28(4.025,-1.25) 29(4.025,-0.75) 30(4.025,-0.25) 31(4.025,0.25) 32(4.025,0.75) 33(4.025,1.25) 34(4.025,1.75) 35(4.025,2.25) 36(4.025,2.75)
  oval 0.25x1.55 smd: 13(-2.75,-4.025) 14(-2.25,-4.025) 15(-1.75,-4.025) 16(-1.25,-4.025) 17(-0.75,-4.025) 18(-0.25,-4.025) 19(0.25,-4.025) 20(0.75,-4.025) 21(1.25,-4.025) 22(1.75,-4.025) 23(2.25,-4.025) 24(2.75,-4.025) 37(2.75,4.025) 38(2.25,4.025) 39(1.75,4.025) 40(1.25,4.025) 41(0.75,4.025) 42(0.25,4.025) 43(-0.25,4.025) 44(-0.75,4.025) 45(-1.25,4.025) 46(-1.75,4.025) 47(-2.25,4.025) 48(-2.75,4.025)
  silkscreen extent -4.15,-2.85 2.85,3.55, body extent -4.5,-4.5 4.5,4.5, height 1.53
"Switch Tactile 5,2mm x 5,2mm" [mm] "Switch Tactile SPST-NO 5,2mm x 5,2mm"
  rect 1x0.7 smd: 1(-3,1.85) 2(3,1.85) 3(-3,-1.85) 4(3,-1.85)
  silkscreen extent -4.87,-2.75 4,2.75, body extent -3.2,-2.6 3.2,2.6, height 1.7
Testpoint_SMD [mm] "Testpoint SMD de 1mm de diametro."
  rrect50% 1x1 smd: 1(0,0)
TSSOP-16 [mm]
  rrect50% 1.5x0.45 smd mask+0.05: 1(-2.9,2.275) 2(-2.9,1.625) 3(-2.9,0.975) 4(-2.9,0.325) 5(-2.9,-0.325) 6(-2.9,-0.975) 7(-2.9,-1.625) 8(-2.9,-2.275) 9(2.9,-2.275) 10(2.9,-1.625) 11(2.9,-0.975) 12(2.9,-0.325) 13(2.9,0.325) 14(2.9,0.975) 15(2.9,1.625) 16(2.9,2.275)
  silkscreen extent -3.03,-2.9 2.2,3.33, body extent -3.2,-2.5 3.2,2.5, height 1.1

## Part data
C1 C2 C3 C4 C6 C7 C14 C15 C16 C18 C19: library part "Generic C", Capacitance=10uF, Case Code (Imperial)=0805, Case Code (Metric)=2012, Dielectric=X5R, Max Operating Temperature=85°C, Min Operating Temperature=-55°C, Package Quantity=1, Tolerance=10%, Voltage Rating=10V, Case/Package=0805, Contact Plating=Tin, Depth=1.25mm, Height=1.25mm, Lead Free="Lead Free", Length=2mm, Mount="Surface Mount", Packaging="Tape and Reel", Radiation Hardening=No, Thickness=0.053inch, Voltage Rating (DC)=10V, Width=0.049inch
C5 C8 C9 C10 C11 C17: library part "Generic C", Capacitance=0,1uF, Case Code (Imperial)=0805, Case Code (Metric)=2012, Dielectric=X5R, Max Operating Temperature=85°C, Min Operating Temperature=-55°C, Package Quantity=1, Tolerance=10%, Voltage Rating=10V, Case/Package=0805, Contact Plating=Tin, Depth=1.25mm, Height=1.25mm, Lead Free="Lead Free", Length=2mm, Mount="Surface Mount", Packaging="Tape and Reel", Radiation Hardening=No, Thickness=0.053inch, Voltage Rating (DC)=10V, Width=0.049inch
C12 C13: library part "Generic C", Capacitance=10pF, Case Code (Imperial)=0805, Case Code (Metric)=2012, Dielectric=X5R, Max Operating Temperature=85°C, Min Operating Temperature=-55°C, Package Quantity=1, Tolerance=10%, Voltage Rating=10V, Case/Package=0805, Contact Plating=Tin, Depth=1.25mm, Height=1.25mm, Lead Free="Lead Free", Length=2mm, Mount="Surface Mount", Packaging="Tape and Reel", Radiation Hardening=No, Thickness=0.053inch, Voltage Rating (DC)=10V, Width=0.049inch
C20 C21: library part "Generic C", Capacitance=470nF, Case Code (Imperial)=0805, Case Code (Metric)=2012, Dielectric=X5R, Max Operating Temperature=85°C, Min Operating Temperature=-55°C, Package Quantity=1, Tolerance=10%, Voltage Rating=10V, Case/Package=0805, Contact Plating=Tin, Depth=1.25mm, Height=1.25mm, Lead Free="Lead Free", Length=2mm, Mount="Surface Mount", Packaging="Tape and Reel", Radiation Hardening=No, Thickness=0.053inch, Voltage Rating (DC)=10V, Width=0.049inch
C22 C23 C24 C25: library part "Generic C", Capacitance=47nF, Case Code (Imperial)=0805, Case Code (Metric)=2012, Dielectric=X5R, Max Operating Temperature=85°C, Min Operating Temperature=-55°C, Package Quantity=1, Tolerance=10%, Voltage Rating=10V, Case/Package=0805, Contact Plating=Tin, Depth=1.25mm, Height=1.25mm, Lead Free="Lead Free", Length=2mm, Mount="Surface Mount", Packaging="Tape and Reel", Radiation Hardening=No, Thickness=0.053inch, Voltage Rating (DC)=10V, Width=0.049inch
D1: library part CMP-57192-000013-1, "LED RED CLEAR SMD SML-LX0805SRC-TR", Case Code (Imperial)=0805, Case Code (Metric)=2012, Color=Red, Current Rating=25mA, Forward Current=20mA, Forward Voltage=1.7V, Lens Color=Colorless, Max Operating Temperature=85°C, Min Operating Temperature=-40°C, Package Quantity=3000, Power Rating=100mW, Approvals=UL, Case/Package=0805, Dominant Wavelength=660nm, Height=1.2mm, Illumination Color=Red, Lead Free="Lead Free", Length=2mm, Lens Style=Clear, Lens Transparency=Clear, Luminous Intensity=25mcd, Mount="Surface Mount", Number of LEDs=1, Number of Pins=2, Packaging="Tape and Reel", RoHS Compliant=Yes, Series=-, Test Current=20mA, Viewing Angle=140°, Voltage Rating=1.7V, Voltage Rating (DC)=1.7V, Wavelength=660nm, Width=1.25mm
FB1: library part CMP-08257-000042-1, "FERRITE BEAD 1 KOHM 0805 1LN", Case Code (Imperial)=0805, Case Code (Metric)=2012, Current Rating=1.5A, DC Resistance (DCR)=150mR, Max Operating Temperature=125°C, Min Operating Temperature=-55°C, Package Quantity=4000, Test Frequency=100MHz, Tolerance=25%, Case/Package=0805, Core Material=Ferrite, Depth=1.25mm, Height=0.85mm, Impedance=1kΩ, Length=0.079inch, Max DC Current=1.5A, Mount="Surface Mount", Packaging="Tape and Reel", REACH SVHC="No SVHC", RoHS Compliant=Yes, Termination=SMD/SMT, Weight=0.000194oz, Width=1.25mm
J1: library part B2B-PH-K-S, "CONN JST HEADER VERT 2POS 2MM for LIPO batteries."
J2: library part CMP-02766-001776-1, "CONN HEADER VERT 4POS 2.54MM", Contact Material=Bronze, Contact Plating=Gold, Gender=Male, Mount="Through Hole", Number of Contacts=4, Number of Rows=1, Packaging=Bulk, Pitch=2.54mm, Radiation Hardening=No, Reach SVHC Compliant=Yes, RoHS Compliant=Yes, Series=HTSW, Termination="Through Hole"
J3: library part CMP-02766-001776_ALT, "CONN HEADER VERT 4POS 2.54MM. Versión alterna.", Contact Material=Bronze, Contact Plating=Gold, Gender=Male, Mount="Through Hole", Number of Contacts=4, Number of Rows=1, Packaging=Bulk, Pitch=2.54mm, Radiation Hardening=No, Reach SVHC Compliant=Yes, RoHS Compliant=Yes, Series=HTSW, Termination="Through Hole"
J4: "Micro SD Memory Card Connector, 1.88mm Profile SMT,Push Push, with normally closed switch"
J5: library part CMP-00595-00270342-1, "PPTC021LGBN-RC 2 Position Total Single Row 2.54 mm Pitch Right Angle Female Header", Color=Black, Current Rating=3A, Max Operating Temperature=105°C, Min Operating Temperature=-40°C, Voltage Rating=250V, Connector Type="Header, Socket", Contact Material="Bronze, Nickel, Tin", Contact Plating=Tin, Height=2.4mm, Housing Color=Black, Housing Material=Plastic, Lead Free="Lead Free", Length=5.58mm, Mount="Through Hole", NexarPartId=270342, Number of Contacts=2, Number of Positions=2, Number of Rows=1, Packaging=Bulk, Pitch=2.54mm, RoHS=Compliant, Termination=Solder, Width=8.5mm
JP1 JP2 JP3 JP4 JP5 JP6 JP7 JP8 JP9 JP10 JP11 JP12 JP13 JP14 JP15 JP16 JP17 JP18 JP19 JP20 JP21 JP22 JP23 JP24 JP25 JP26: "Simbolo de jumper genérico"
Q1: library part CMP-02550-000184-1, "MOSFET N-CH 20V 2.6A SOT-23", Continuous Drain Current=2.6A, Drain To Source Breakdown Voltage=20V, Drain To Source Resistance=0.045Ω, Gate To Source Voltage=8V, Manufacturer=Vishay, Max Forward Diode Voltage=1.2V, Max Junction Temp=+150°C, Package=S-03946, Power Dissipation=0.71W, Pulse Drain Current=10A, Temperature="-55°C to +150°C", Temperature Range Low=-55°C, Typ Forward Diode Voltage=0.7V, Automotive=No, Category=Trans, ComponentLink2Description=Datasheet, ComponentLink2URL=http://www.vishay.com/docs/68645/si2302cds.pdf, Depletion Mode=False, Device Class L1="Discrete Semiconductors", Device Class L2=Transistors, Device Class L3=MOSFETs, Digikey Description="MOSFET N-CH 20V 2.6A SOT-23", Drain To Source Voltage=20V, Gate Charge At Vgs="3.5nC @ 4.5V", Height=1.12mm, Lead Free=Yes, Manufacturer Part Number=SI2302CDS-T1-E3, Mouser Description="MOSFET 20V 2.9A 0.86W 57mohm @ 4.5V", Number Of Channels=1, Number Of N Channels=1, Octopart=https://octopart.com/si2302cds-t1-e3-vishay-44452855, Reverse Recovery Charge=2nC, Reverse Recovery Time=8.5ns, RoHS=TRUE, Rthja Max=140°C/W, Standoff Height=0.01mm, Temperature Range High=+150°C, Threshold Vgs Max=0.85V, Threshold Vgs Min=0.4V, Transconductance=13S, Turn Off Delay Time=30ns, Turn On Delay Time=8ns
R1 R2 R3 R4 R5 R6 R7 R8 R9 R10 R12 R13 R14 R15 R16 R17 R18 R19 R20 R21 R22 R23 R24 R25 R26 R27 R28 R29 R30 R31 R32: library part "Generic R"
R11: library part "Generic LDR", Dark Resistance=1MΩ, Light Resistance=10kΩ, Diameter=5mm, Spectral Response Range=400-700nm
S1: "Switch Tactile SPST-NO 5,2mm x 5,2mm"
TP1 TP2 TP3 TP4 TP5 TP6 TP7 TP8 TP9 TP10 TP11 TP12 TP13 TP14 TP15 TP16 TP17 TP18 TP19 TP20 TP21 TP22 TP23 TP24 TP25 TP26 TP27 TP28 TP29 TP30 TP31 TP32 TP33: library part Testpoint_SMD, "Testpoint SMD de 1mm de diametro."
U1: "ARM Cortex-M3 32-bit MCU, 64 KB Flash, 20 KB Internal RAM, 37 I/Os, 48-pin LQFP, -40 to 85 degC, Tray", I/Os (High Current)=37, Operating Frequency(F) (Processor speed) (MHz)=72, Supply Voltage(Vcc) min (V)=2, A/D Converter="2x12-bit (10 Channel)", ComponentLink1Description="Manufacturer URL", ComponentLink1URL=http://www.st.com/web/en/home.html, ComponentLink2Description=Datasheet, ComponentLink2URL=http://www.st.com/st-web-ui/static/active/en/resource/technical/document/datasheet/CD00161566.pdf, ComponentLink3Description="Package Specification", ComponentLink3URL=http://www.st.com/st-web-ui/static/active/en/resource/technical/document/datasheet/DM00058181.pdf, Core="ARM Cortex-M3", DatasheetVersion="Rev. 16", FLASH Size (Prog) (kB)=64, Internal RAM Size (kB)=20, Mounting Technology="Surface Mount", PackageDescription="48-Pin Low Profile Quad Flat Package, 7 x 7 mm Body, 0.5 mm Pitch", PackageReference=LQFP48, PackageVersion="Rev. 6, 06/2013", Packing=Tray, PartNumber=STM32F103C8T6
U2 U3: "IC REG LINEAR 3V 300MA SOT23-5"
U4: library part "DS3231S# for battery use", "IC RTC CLK/CALENDAR I2C 16SOIC. Symbol used with battery as the main supply voltage."
U5: library part HM10, "Modulo BLE HM10 con castellated pads."
U6: "ADS1220 4-Channel, 2-kSPS, Low-Power, 24-Bit ADC with Integrated PGA and Reference"
Y1: "Cristal SMD 4-P genérico", Frequency="8 MHz", Manufacturer="Shenzhen SCTF Elec", Manufacturer part=SX5B8.000F1020F30, Package=SMD5032-4P, CL="10 pF", Datasheet=https://jlcpcb.com/api/file/downloadByFileSystemAccessId/8590208237112238080, ESR="100 Ω"

## Free pads (board coordinates)
  round 0 hole 3 unplated mask+0.102: MH1(4,4) MH1(4,76) MH1(76,4) MH1(76,76)

## Via types
v1: diameter 0.6, hole 0.3, L1 - TOP (Sig) to L4 - BOT (Sig), tented top, 100 vias

## Nets (pads, with @x,y where several pads share a name; then routed paths per layer and width w, separated by ;. In a path a pad name is that pad's centre, name@x,y a point inside that pad or via, vN(x,y) a via of type N, cw(c..) or ccw(c..) an arc to the next point about the centre after c; other vN are vias at no path point)
+3V: C2.1 JP1.1 JP2.1 JP7.1 JP10.1 JP15.1 JP26.1 TP2.1 U2.5 | length 178.6
  L1 - TOP (Sig) w0.5: v1(23.7,61.4) 26.6,61.4 27.4,62.2 27.4,65.077 C2.1@27.45,65.127 ; JP1.1@23.8,57.65 23.8,59.107 24.093,59.4 v1(25.5,59.4) 27.4,59.4 30.4,56.4 v1(30.4,55) ; JP2.1@38.5,25.7 39.7,25.7 42.6,28.6 v1(42.6,31.1) ; v1(52.7,69.2) 52.7,69.173 52.8,69.073 JP15.1@52.8,67.5 ; v1(65,50.7) 65.01,50.69 65.01,47.41 JP26.1@65.02,47.4
  L4 - BOT (Sig) w0.5: JP7.1@10.3,24.8 10.3,23.4 12.7,21 30.7,21 42.6,32.9 ; v1(23.7,61.4) 23.719,61.381 23.719,61.181 v1(25.5,59.4) 25.5,53.7 46,33.2 ; v1(30.4,55) 34,51.4 JP10.1@36.7,51.4 ; v1(42.6,31.1) 42.6,32.9 ; v1(52.7,69.2) 56.9,69.2 59.6,66.5 59.6,53.093 60.787,51.906 63.794,51.906 v1(65,50.7) 65,44.4 53.8,33.2 46,33.2 ; 42.6,32.9 42.6,32.907 42.893,33.2 46,33.2
+3V_ADS_A: C19.1 FB1.2 TP32.1 U6.12 | length 23.2
  L1 - TOP (Sig) w0.25: U6.12@59.8,37.2 60.9,37.2
  L1 - TOP (Sig) w0.3: 60.9,37.2 61.2,37.2
  L1 - TOP (Sig) w0.4: 61.2,37.2 61.5,37.2 ; C19.1@62.675,37.001 63.082,36.594 63.082,36.034 63.316,35.8 65.7,35.8 66,36.1 67.101,36.1 67.335,36.334 67.335,36.862 FB1.2@67.798,37.325 69.925,37.325 75.1,42.5 TP32.1@75.1,46.4
  L1 - TOP (Sig) w0.5: 61.5,37.2 62.476,37.2 C19.1@62.675,37.001
+3V_ADS_D: C18.1 JP26.2 TP31.1 U6.13 | length 17.3
  L1 - TOP (Sig) w0.25: U6.13@59.8,37.85 61.05,37.85 61.3,38.1
  L1 - TOP (Sig) w0.3: 61.3,38.1 61.5,38.3
  L1 - TOP (Sig) w0.4: 61.5,38.3 61.6,38.4 61.6,38.8 61.799,38.999 62.248,38.999 C18.1@62.673,39.424
  L1 - TOP (Sig) w0.5: C18.1@62.673,39.425 62.673,41.373 65.02,43.72 JP26.2@65.02,46 68,46 68.4,46.4 TP31.1@70.8,46.4
+3V_BLE: C15.1 JP10.2 R9.1 R10.1 TP15.1 U5.12 | length 31
  L4 - BOT (Sig) w0.5: TP15.1@43.9,51.4 JP10.2@38.1,51.4 38.137,51.438 38.137,53.762 R10.1@38.175,53.8 41.2,53.8 45.1,57.7 47.9,57.7 48.5,58.3 48.5,62.093 ; U5.12@44.168,61.942 U5.12@44.1,61.875 44.138,61.837 46.763,61.837 C15.1@46.8,61.8 48.207,61.8 48.5,62.093 ; R9.1@48.4,64.2 48.5,64.1 48.5,62.093
+3V_MCU: C6.1 C7.1 C8.1 C9.1 C10.1 C11.1 J2.1 JP1.2 R6.1 R7.1 TP8.1 U1.1 U1.9 U1.24 U1.36 U1.48 | length 92.4
  L1 - TOP (Sig) w0.25: 11.8,48.8 11.925,48.925 U1.9@13.052,48.925 ; U1.36@21.102,52.925 21.752,52.925 22.027,53.2 22.2,53.2
  L1 - TOP (Sig) w0.3: 11.6,48.6 11.8,48.8 ; 22.2,53.2 22.4,53.2
  L1 - TOP (Sig) w0.4: 11.3,48.3 11.6,48.6 ; 22.4,53.2 22.6,53.2
  L1 - TOP (Sig) w0.5: C8.1@10.127,53.7 C8.1@10.502,53.325 ; 11.3,48.3 11.15,48.15 10.575,48.15 C6.1@10.2,47.775 10.275,47.775 11.231,46.819 11.681,46.819 v1(11.7,46.8) ; C9.1@13.775,57.1 C9.1@14.1,56.775 ; C11.1@19.831,43.646 C11.1@20.177,43.3 ; v1(22,57.1) 22,55.252 23.752,53.5 C10.1@23.827,53.5 23.527,53.2 22.6,53.2 ; C10.1@23.814,53.513 23.814,56.186 JP1.2@23.8,56.2 TP8.1@28,56.2
  L4 - BOT (Sig) w0.5: J2.1@2.8,28.82 1.393,28.82 1.1,29.113 1.1,38.4 5.4,42.7 5.4,50.8 v1(11.8,57.2) 13.6,55.4 20.3,55.4 21.786,56.886 ; v1(11.7,46.8) 11.7,49 13.9,51.2 16.4,51.2 18.7,48.9 21.8,48.9 ; v1(21.2,45.9) 21.2,47.114 21.8,47.714 21.8,48.9 ; v1(22,57.1) 22,57.073 21.8,56.873 21.8,48.9
+3V_RTC: C14.1 JP7.2 R8.1 TP13.1 U4.14 | length 33.4
  L4 - BOT (Sig) w0.5: JP7.2@10.3,26.2 9.2,26.2 7.7,27.7 7.7,31 8.3,31.6 10.453,31.6 R8.1@10.578,31.475 10.578,35.478 15.1,40 20.8,40 ; U4.14@19.728,35.3 19.766,35.338 C14.1@19.766,38.016 ; C14.1@19.95,38.2 20,38.25 20,39.2 20.8,40 ; TP13.1@23.5,40 20.8,40
+3V_SD: C16.1 J4.4 JP15.2 R20.1 R21.1 R22.1 R23.1 R24.1 R25.1 TP30.1 | length 64.4
  L1 - TOP (Sig) w0.4: 59.5,71.6 66.8,71.6
  L1 - TOP (Sig) w0.5: JP15.2@54.2,67.5 56.573,67.5 56.973,67.1 v1(57,67.1) 57.027,67.1 57.067,67.06 58.7,67.06 58.725,67.085 R20.1@58.725,67.26 R23.1@58.725,70 58.725,71.307 59.018,71.6 59.5,71.6 ; v1(57,54.6) 57.027,54.6 57.117,54.69 58.615,54.69 R24.1@58.625,54.7 ; v1(57,57.7) 57.027,57.7 57.067,57.66 R22.1@58.7,57.66 ; v1(57,60.2) R25.1@58.7,60.2 ; v1(57,63.91) 57.019,63.929 57.019,64.189 57.35,64.52 R21.1@58.7,64.52 ; 66.8,71.6 68.2,71.6 70.4,73.8 TP30.1@70.4,75.8 71.6,75.8 74.3,73.1 74.3,71.875 C16.1@74.225,71.8 74.225,68.675 77.9,65 77.9,62.1 77.29,61.49 J4.4@74.65,61.49
  L4 - BOT (Sig) w0.5: v1(57,54.6) 57,57.654 56.981,57.673 57,57.692 v1(57,60.2) v1(57,67.1)
+3V_SHT: J3.1 JP2.2 TP9.1 | length 10.4
  L1 - TOP (Sig) w0.6: J3.1@40.9,18.4 40.9,20.5 38.5,22.9 JP2.2@38.5,24.3 TP9.1@41.973,24.3
+3VA: C4.1 R26.1 TP6.1 U3.5 | length 63.7
  L1 - TOP (Sig) w0.3: 53.003,73.297 63.6,73.297
  L1 - TOP (Sig) w0.4: 52.328,73.3 53,73.3 53.003,73.297 ; 63.6,73.297 64.671,73.297
  L1 - TOP (Sig) w0.5: C4.1@41.425,65.127 C4.1@41.5,65.202 ; TP6.1@45.9,64.394 45.9,67.8 51.4,73.3 52.328,73.3 ; 64.671,73.297 66.769,73.297 67.073,73.6 v1(67.1,73.6) ; R26.1@69.2,41.3 69.281,41.219 71.481,41.219 v1(71.5,41.2)
  L4 - BOT (Sig) w0.5: v1(67.1,73.6) 67.1,61 70.8,57.3 70.8,41.9 v1(71.5,41.2)
ADC_DRDY: JP23.2 R19.2 TP28.1 | length 31
  L1 - TOP (Sig) w0.15: R19.2@35.85,50.142 36.092,49.9 44.9,49.9 ; TP28.1@45.1,51.2 45.1,50.1 44.9,49.9 ; JP23.2@62.22,47.4 62.22,48.68 59.3,51.6 48.1,51.6 46.4,49.9 44.9,49.9
ADC_DRDY_MCU: R19.1 U1.30 | length 13.9
  L1 - TOP (Sig) w0.15: U1.30@21.102,49.925 25.275,49.925 25.9,49.3 31,49.3 31.9,50.2 34.242,50.2 R19.1@34.3,50.142
ADS_CS: JP25.2 U6.2 | length 9.8
  L1 - TOP (Sig) w0.15: U6.2@54,39.15 54.037,39.187 54.887,39.187 55.114,39.414 55.514,39.414 v1(55.6,39.5) ; v1(58.4,43) 59.46,44.06 JP25.2@59.46,46
  L4 - BOT (Sig) w0.15: v1(55.6,39.5) 55.6,40.2 v1(58.4,43)
ADS_DIN: JP22.2 U6.16 | length 7.8
  L1 - TOP (Sig) w0.15: JP22.2@56.7,46 56.7,42.6 59.186,40.114 59.186,39.947 59.333,39.8 U6.16@59.8,39.8